# Altium PCB FTDI_ISP.PcbDoc
Units mil, origin at the board's own origin, x right, y up, seen from the top; angles counter-clockwise.
Board outline 6000 x 4000 mil, 2 copper layers (Top Layer, Bottom Layer); 16 components, 21 nets, 102 pads, 0 vias.
Unrouted connection lines stored in the file: 46.
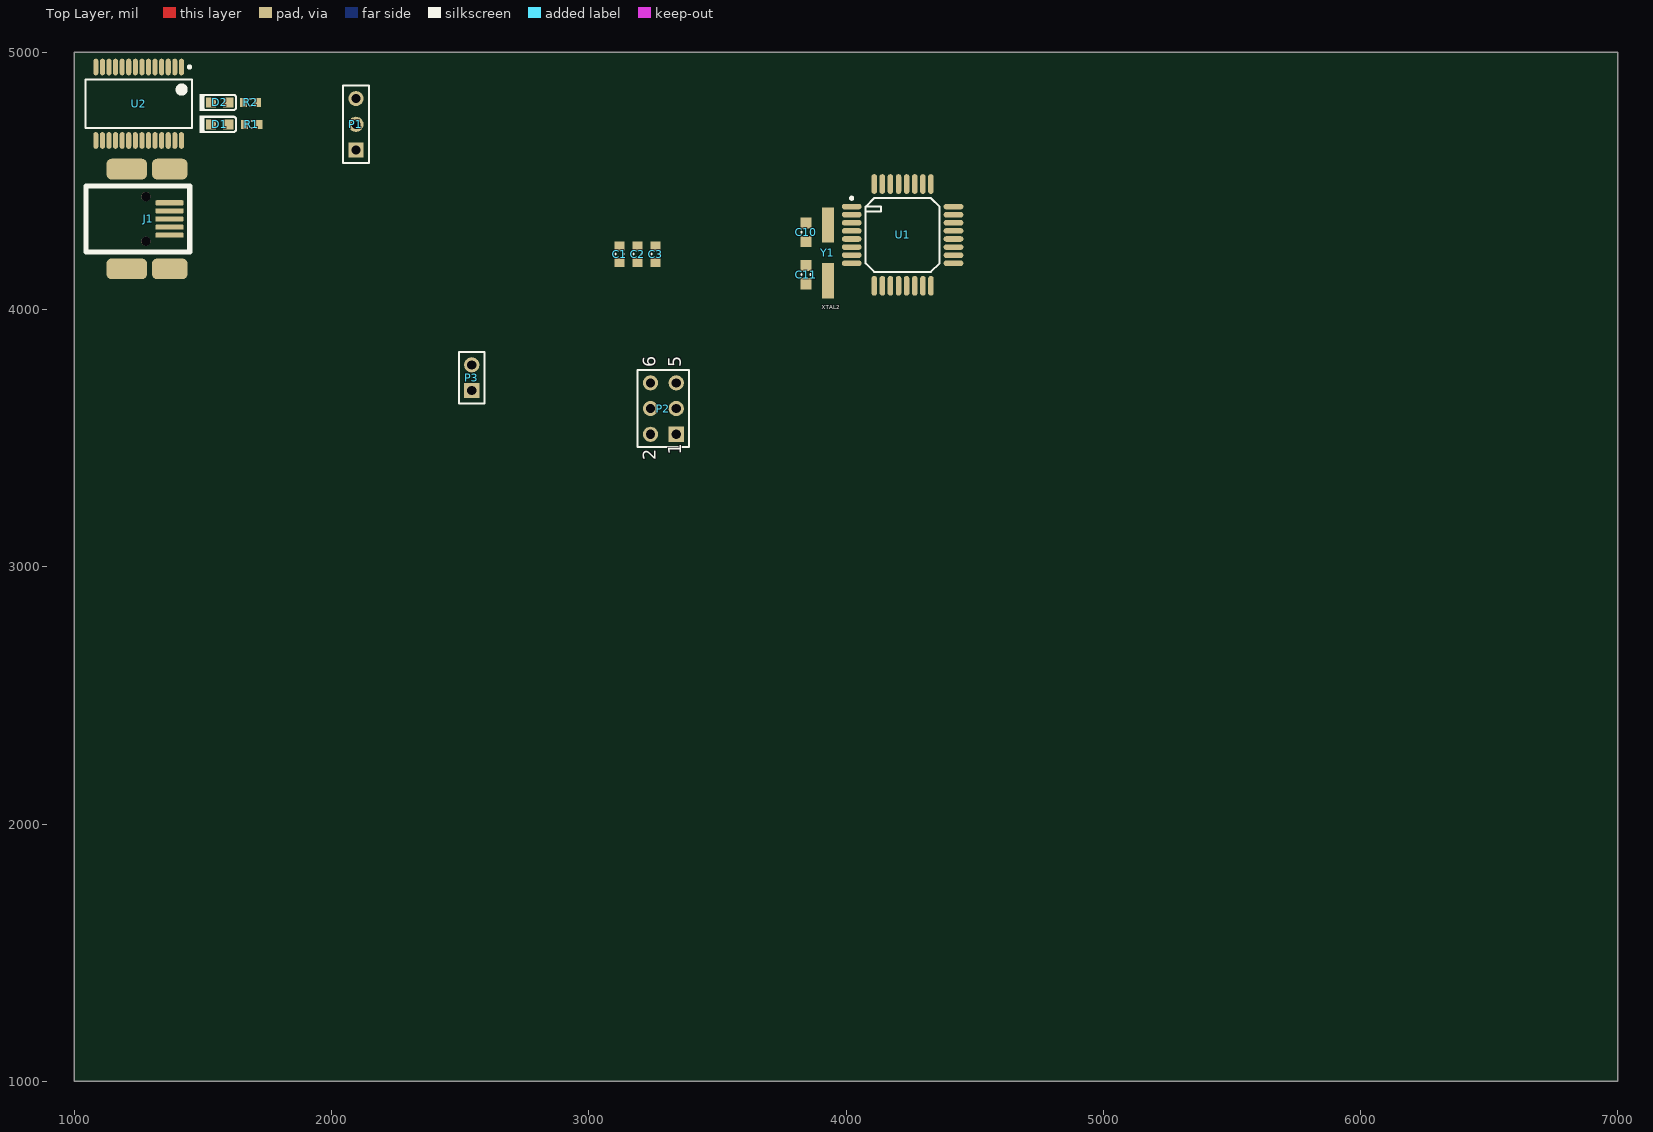
[diagram p0: Top Layer view]
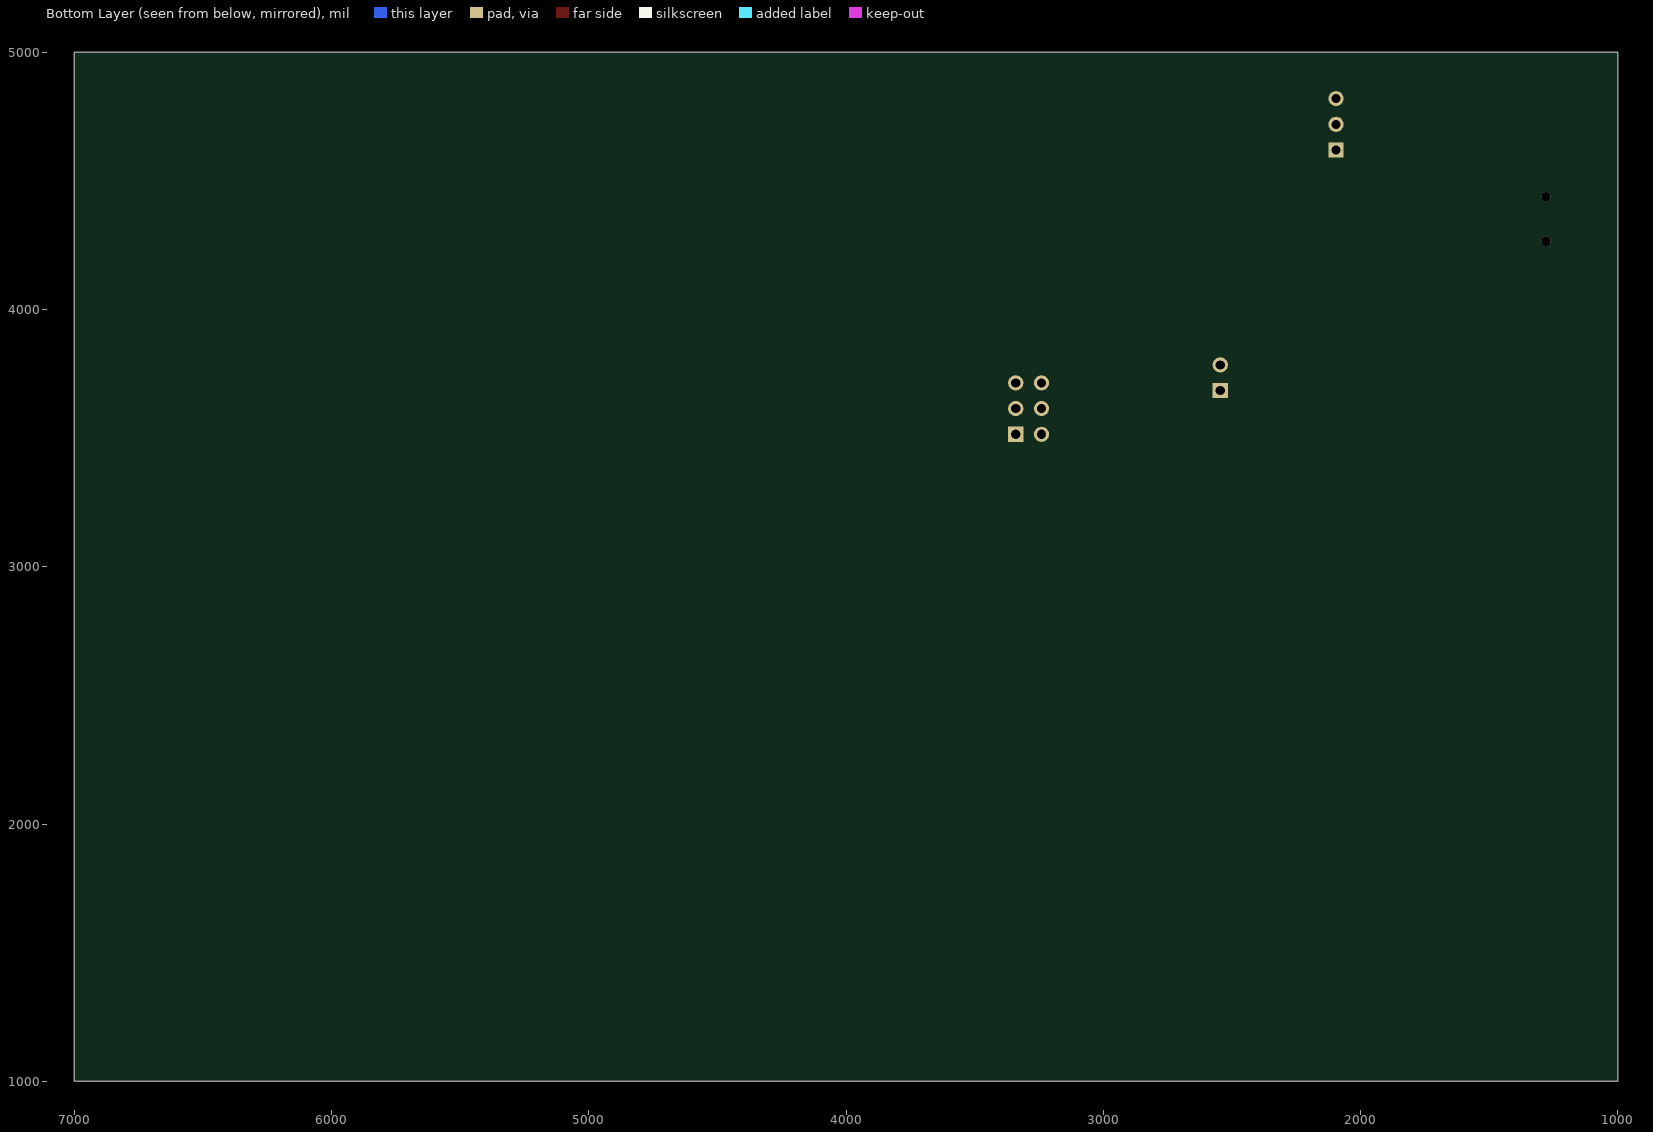
[diagram p1: Bottom Layer view, seen from below]

## Layer stack, top to bottom
Top Solder: solder mask 0.4, Solder Resist, Dk 3.5
Top Layer: signal copper 1.4
Dielectric 1: dielectric 12.6, FR-4, Dk 4.8
Bottom Layer: signal copper 1.4
Bottom Solder: solder mask 0.4, Solder Resist, Dk 3.5

## Board outline
1000,1000 7000,1000 7000,5000 1000,5000

## Design rules (kind name [scope] priority, off if disabled: settings)
Clearance Clearance_ft232 [(InComponent('U1') OR InComponent('U2'))] p1: gap=4
Clearance Clearance_1 [All] p2: gap=6
PolygonConnect [All] p1: connectstyle=Relief reliefconductorwidth=10 reliefentries=4 polygonreliefangle="90 Angle" airgapwidth=10
RoutingVias [All] p1: holewidth=28 width=50 viastyle="Through Hole" minholewidth=28 minwidth=50 maxholewidth=28 maxwidth=50
SolderMaskExpansion [All] p1: expansion=4
UnpouredPolygon [All] p1: allowunpoured=FALSE
Width [All] p1: maxlimit=40 minlimit=3 preferedwidth=10
29 further rules are at their usual default settings.

## Components (designator, comment, footprint, x,y, rotation, side; value= is the part's Value field where it differs from the comment)
C1 "100nF" CAPC0603(1608)100_N 3120,4215 r90 top
C2 "10uF" CAPC0603(1608)100_N 3190,4215 r90 top
C3 "100nF" CAPC0603(1608)100_N 3260,4215 r90 top
C10 "22pF" CAPC0603(1608)100_M 3845,4300.43 r90 top
C11 "22pF" CAPC0603(1608)100_M 3845,4135.43 r270 top
D1 "APG1608SEKC/T" KING-LED0603-25-ORANGE_V 1565,4720 r0 top
D2 "APG1608SEKC/T" KING-LED0603-25-ORANGE_V 1565,4805 r0 top
J1 "67503-1020" MOLX-67503-1020_V 1370,4415 r0 top
P1 "Header 3" HDR1X3 2095,4620 r90 top
P2 "Header 3X2" HDR2X3 3340,3515 r90 top
P3 "Header 2" HDR1X2 2545,3685 r90 top
R1 "1K1 5% 0603(1608)" RESC0603(1608)_L 1690,4720 r180 top
R2 "1K1 5% 0603(1608)" RESC0603(1608)_L 1685,4805 r180 top
U1 "atmega328" atmega44/88/168 4220,4290 r0 top
U2 "FT232RL" FT232RL-SOP 1250,4800 r270 top
Y1 "XTAL2" HC49/US 3930,4220.43 r270 top

## Footprints (in the part's own frame and the unit in brackets; to place one, negate y for a bottom-side part, rotate by r counter-clockwise, add the part's x,y. Pads: shape width x height; smd on the part's side, far side on the other; paste and mask are expansions set on the pad)
atmega44/88/168 [mm] "CQFP, 32-Leads, Body 11.15x11.15mm, Pitch 0.80mm, IPC Medium Density"
  oval 1.95x0.55 smd: 1(-5.025,2.8) 2(-5.025,2) 3(-5.025,1.2) 4(-5.025,0.4) 5(-5.025,-0.4) 6(-5.025,-1.2) 7(-5.025,-2) 8(-5.025,-2.8) 17(5.025,-2.8) 18(5.025,-2) 19(5.025,-1.2) 20(5.025,-0.4) 21(5.025,0.4) 22(5.025,1.2) 23(5.025,2) 24(5.025,2.8)
  oval 0.55x1.95 smd: 9(-2.8,-5.025) 10(-2,-5.025) 11(-1.2,-5.025) 12(-0.4,-5.025) 13(0.4,-5.025) 14(1.2,-5.025) 15(2,-5.025) 16(2.8,-5.025) 25(2.8,5.025) 26(2,5.025) 27(1.2,5.025) 28(0.4,5.025) 29(-0.4,5.025) 30(-1.2,5.025) 31(-2,5.025) 32(-2.8,5.025)
  silkscreen extent -5.15,-3.65 3.65,3.75, body extent -3.5,-3.5 3.5,3.5, height 1.2
CAPC0603(1608)100_M [mm] "Chip Capacitor, Body 1.6x0.8mm, Height 1.0mm, IPC Low Density"
  rect 1.1x1.1 smd: 1(-0.9,0) 2(0.9,0)
  silkscreen extent -0.05,-0.45 0.05,0.45, body extent -0.87,-0.47 0.88,0.48, height 1
CAPC0603(1608)100_N [mm] "Chip Capacitor, Body 1.6x0.8mm, Height 1.0mm, IPC Medium Density"
  rect 0.9x1 smd: 1(-0.8,0) 2(0.8,0)
  silkscreen extent -0.05,-0.4 0.05,0.4, body extent -0.87,-0.48 0.88,0.47, height 1
FT232RL-SOP [mm] "SOP, 28-Leads, Body 10.20x5.30mm, Pitch 0.65mm, IPC Medium Density"
  oval 1.65x0.5 smd: 1(-3.625,4.225) 2(-3.625,3.575) 3(-3.625,2.925) 4(-3.625,2.275) 5(-3.625,1.625) 6(-3.625,0.975) 7(-3.625,0.325) 8(-3.625,-0.325) 9(-3.625,-0.975) 10(-3.625,-1.625) 11(-3.625,-2.275) 12(-3.625,-2.925) 13(-3.625,-3.575) 14(-3.625,-4.225) 15(3.625,-4.225) 16(3.625,-3.575) 17(3.625,-2.925) 18(3.625,-2.275) 19(3.625,-1.625) 20(3.625,-0.975) 21(3.625,-0.325) 22(3.625,0.325) 23(3.625,0.975) 24(3.625,1.625) 25(3.625,2.275) 26(3.625,2.925) 27(3.625,3.575) 28(3.625,4.225)
  silkscreen extent -3.75,-5.25 2.4,5.25, body extent -2.8,-5.25 2.8,5.25, height 2
HC49/US [mm] "Two Lead Surface Mount Crystal Oscillator"
  rect 3.5x1.2 smd: 1(-2.75,0) 2(2.75,0)
HDR1X2 [mm] "Connector; Header; 2 Position"
  rect 1.5x1.5 hole 0.9: 1(0,0)
  round 1.5 hole 0.9: 2(2.54,0)
  silkscreen extent -1.27,-1.27 3.81,1.27
HDR1X3 [mm] "Connector; Header; 3 Position"
  rect 1.5x1.5 hole 0.9: 1(0,0)
  round 1.5 hole 0.9: 2(2.54,0) 3(5.08,0)
  silkscreen extent -1.27,-1.27 6.35,1.27
HDR2X3 [mm] "Connector; Header; 3x2 Position"
  rect 1.5x1.5 hole 0.9: 1(0,0)
  round 1.5 hole 0.9: 2(0,2.54) 3(2.54,0) 4(2.54,2.54) 5(5.08,0) 6(5.08,2.54)
  silkscreen extent -1.27,-1.27 6.35,3.81
KING-LED0603-25-ORANGE_V [mm] "LED, SMT, Body 1.6 x 0.8 mm, 0.25mm Thickness"
  rect 1x1 smd paste+0 mask+0: 1(0.85,0) 2(-0.85,0)
  silkscreen extent -1.97,-0.85 1.6,0.85, body extent -0.8,-0.4 0.8,0.4, height 0.25
MOLX-67503-1020_V [mm] "Mini USB Connector, SMT, Righer Angle"
  rrect50% 2.8x0.5 smd: 1(0,0) 2(0,-0.8) 3(0,-1.6) 4(0,-2.4) 5(0,-3.2)
  rrect50% 3.5x2.05 smd: 6(0.025,3.325) 8(0.025,-6.525)
  rrect50% 4x2.05 smd: 7(-4.225,3.325) 9(-4.225,-6.525)
  round 0.9 hole 0.9 unplated: X(-2.325,-3.8) Y(-2.325,0.6)
  silkscreen extent -8.25,-4.85 2,1.65, body extent -8.22,-6.56 0.78,3.34, height 3.95
RESC0603(1608)_L [mm] "Chip Resistor, Body 1.6x0.8mm, IPC High Density"
  rect 0.7x0.9 smd: 1(-0.7,0) 2(0.7,0)
  silkscreen extent -0.05,-0.35 0.05,0.35, body extent -0.85,-0.47 0.85,0.47, height 0.6

## Part data
C1 C3: library part CMP-1035-02582-1, "CAP 100nF 10V -20% to +80% 0603 (1608 Metric) Thickness 1mm SMD"
C2: library part CMP-1035-02799-1, "CAP 10uF 10V ±10% 0603 (1608 Metric) Thickness 1mm SMD"
C10 C11: library part CMP-1035-00797-1, "CAP 22pF 10V ±0.25pF 0603 (1608 Metric) Thickness 1mm SMD"
D1 D2: library part CMP-0239-00002-1, "LED, SMT, 0603(1608), 0.25mm Tthickness, Super Bright Orange"
J1: library part CMP-0411-00002-1, "USB, MINI, SMD, RA KME04-USBMU03A01"
P1: "Header, 3-Pin"
P2: "Header, 3-Pin, Dual row"
P3: "Header, 2-Pin"
R1 R2: library part CMP-1012-00075-1, "1K1 0.1W 5% 0603 (1608 Metric)  SMD"
U1: library part atmega88
Y1: "Two Lead Crystal Oscillator"

## Nets (pads, with @x,y where several pads share a name; then routed paths per layer and width w, separated by ;. In a path a pad name is that pad's centre, name@x,y a point inside that pad or via, vN(x,y) a via of type N, cw(c..) or ccw(c..) an arc to the next point about the centre after c; other vN are vias at no path point)
3.3V: C3.2 P1.1 U2.17
5V: C1.2 C2.2 J1.1 P1.3 R1.1 R2.1 U2.20
CTS: U2.11
DTR: U1.29 U2.2
GND: C1.1 C2.1 C3.1 C10.1 C11.1 J1.5 P2.6 U1.3 U1.5 U1.21 U2.7 U2.18 U2.21 U2.25 U2.26
MISO: P2.1 U1.16
MOSI: P2.4 U1.15
NetC10_2: C10.2 U1.7 Y1.1
NetC11_2: C11.2 U1.8 Y1.2
NetD1_1: D1.1 R1.2
NetD2_1: D2.1 R2.2
POWER: P1.2 P3.1 U1.4 U1.6 U1.18 U1.20 U2.4
POWEROPT: P2.2 P3.2
RESET: P2.5 U1.14
RXI: U1.31 U2.5
RXLED: D2.2 U2.22
SCK: P2.3 U1.17
TXLED: D1.2 U2.23
TXO: U1.30 U2.1
USBDM: J1.2 U2.16
USBDP: J1.3 U2.15
pads on no net: J1.4 J1.6 J1.7 J1.8 J1.9 J1.X J1.Y U1.1 U1.2 U1.9 U1.10 U1.11 U1.12 U1.13 U1.19 U1.22 U1.23 U1.24 U1.25 U1.26 U1.27 U1.28 U1.32 U2.3 U2.6 U2.8 U2.9 U2.10 U2.12 U2.13 U2.14 U2.19 U2.24 U2.27 U2.28

## Text inside footprints (layer, text, board x,y; h text height)
P2: Top Overlay "6" at 3260,3775 h50 r90; Top Overlay "5" at 3360,3775 h50 r90; Top Overlay "2" at 3260,3415 h50 r90; Top Overlay "1" at 3360,3435 h50 r90